# EAGLE board breakout (EAGLE 7.5.0)
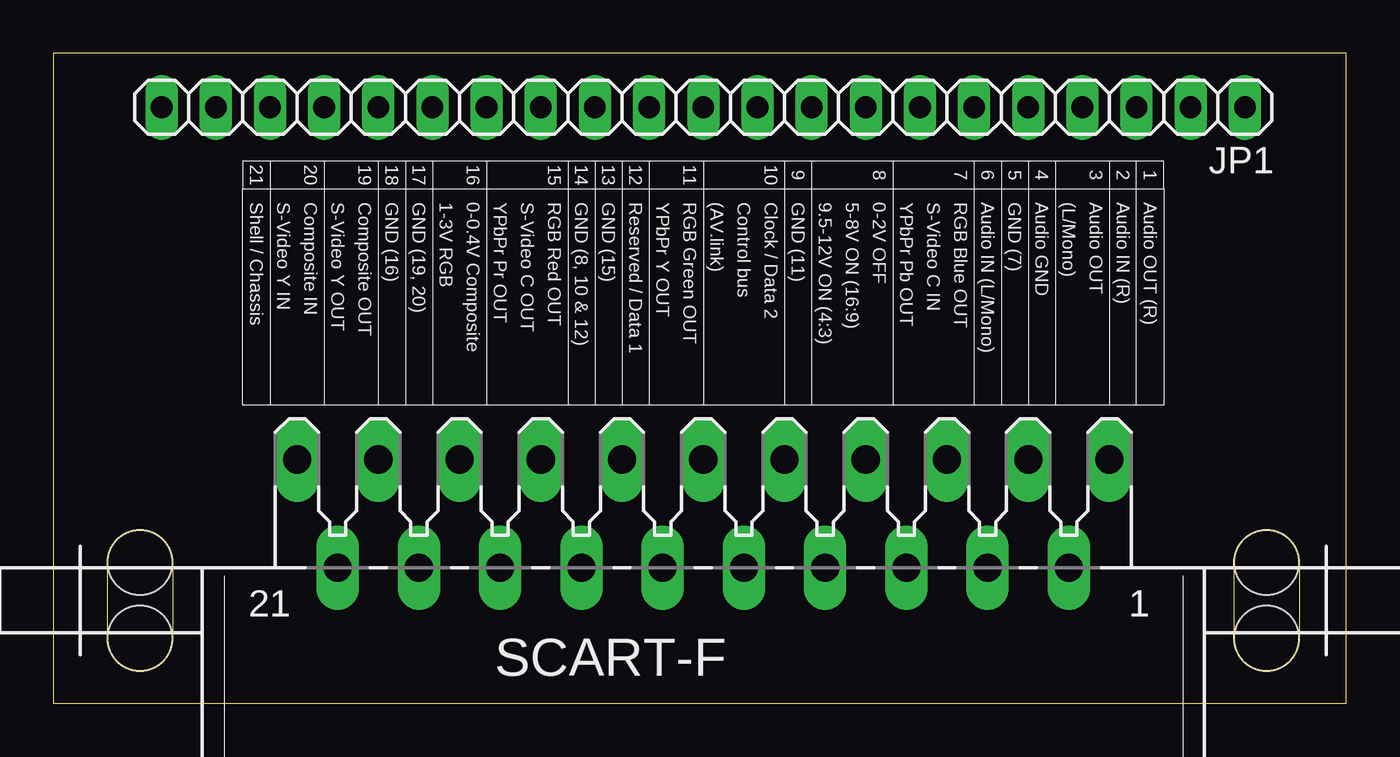
[diagram p0: board, top side]
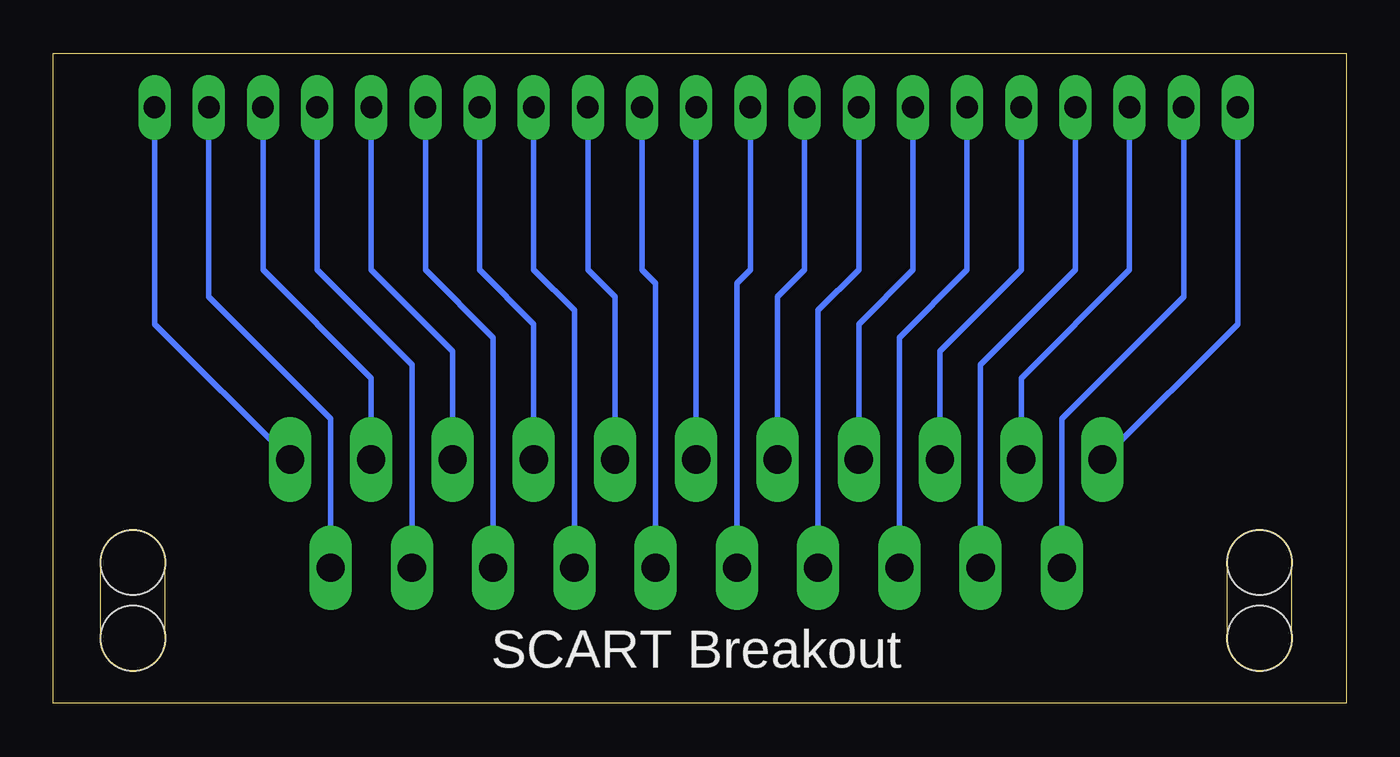
[diagram p1: board, bottom side, seen from below]

Size 60.63 x 30.47 mm. Coordinates in mm from the lower left corner, seen from the top.
Outline: 0,0 60.63,0 60.63,30.47 0,30.47 0,0
Copper layers (1*16): Top 0.035mm / dielectric 1.5mm / Bottom 0.035mm
Design rules "default": minimum track width 10mil, minimum drill 24mil, track to track 8mil, track to pad 8mil, pad to pad 8mil, via to via 8mil, smd to smd 8mil, copper to edge 40mil, drill to drill 8mil, minimum pad ring 10mil, minimum via ring 8mil, stop-mask expansion 4mil, vias tented up to drill 0mil, thermal gap 10mil

## Footprints (pad centres in the part's own frame; a part is rotated, then mirrored left to right if it is on the bottom)
1X21 = drill 1.016 long: 1 -25.4,0; 2 -22.86,0; 3 -20.32,0; 4 -17.78,0; 5 -15.24,0; 6 -12.7,0; 7 -10.16,0; 8 -7.62,0; 9 -5.08,0; 10 -2.54,0; 11 0,0; 12 2.54,0; 13 5.08,0; 14 7.62,0; 15 10.16,0; 16 12.7,0; 17 15.24,0; 18 17.78,0; 19 20.32,0; 20 22.86,0; 21 25.4,0
SCART-F = drill 1.321 long: 1 19.05,5.08; 2 17.145,0; 3 15.24,5.08; 4 13.335,0; 5 11.43,5.08; 6 9.525,0; 7 7.62,5.08; 8 5.715,0; 9 3.81,5.08; 10 1.905,0; 11 0,5.08; 12 -1.905,0; 13 -3.81,5.08; 14 -5.715,0; 15 -7.62,5.08; 16 -9.525,0; 17 -11.43,5.08; 18 -13.335,0; 19 -15.24,5.08; 20 -17.145,0; 21 -19.05,5.08 | hole 3.023: 26.416,0.254; 26.416,-3.302; -26.416,0.254; -26.416,-3.302

## Placement (x,y rotation side)
JP1  [1X21]  30.48,27.94 180 top
X1  SCART-F  [SCART-F]  30.48,6.35 0 top

## Library data of the parts
JP1 = pinhead
X1 = con-hirschmann; OC_FARNELL: unknown; OC_NEWARK: unknown

## Nets
N$1: JP1.10 X1.10
N$2: JP1.12 X1.12
N$3: JP1.8 X1.8
N$4: JP1.6 X1.6
N$5: JP1.4 X1.4
N$6: JP1.2 X1.2
N$7: JP1.14 X1.14
N$8: JP1.16 X1.16
N$9: JP1.18 X1.18
N$10: JP1.20 X1.20
N$11: JP1.21 X1.21
N$12: JP1.19 X1.19
N$13: JP1.17 X1.17
N$14: JP1.15 X1.15
N$15: JP1.13 X1.13
N$16: JP1.11 X1.11
N$17: JP1.9 X1.9
N$18: JP1.7 X1.7
N$19: JP1.5 X1.5
N$20: JP1.3 X1.3
N$21: JP1.1 X1.1

## Tracks (layer width: path | path; a pad name or v marks a point on that pad's centre or on a via)
N$1
  Bottom 0.254: X1.10 32.38,19.68 33.02,20.32 JP1.10
N$2
  Bottom 0.254: X1.12 28.57,19.68 27.94,20.32 JP1.12
N$3
  Bottom 0.254: X1.8 36.2,18.41 38.1,20.32 JP1.8
N$4
  Bottom 0.254: X1.6 40.01,17.14 43.18,20.32 JP1.6
N$5
  Bottom 0.254: X1.4 43.81,15.88 48.26,20.32 JP1.4
N$6
  Bottom 0.254: X1.2 47.62,13.34 53.34,19.05 JP1.2
N$7
  Bottom 0.254: X1.14 24.77,18.41 22.86,20.32 JP1.14
N$8
  Bottom 0.254: X1.16 20.95,17.14 17.78,20.32 JP1.16
N$9
  Bottom 0.254: X1.18 17.14,15.88 12.7,20.32 JP1.18
N$10
  Bottom 0.254: X1.20 13.34,13.34 7.62,19.05 JP1.20
N$11
  Bottom 0.254: X1.21 5.08,17.78 JP1.21
N$12
  Bottom 0.254: X1.19 15.24,15.24 10.16,20.32 JP1.19
N$13
  Bottom 0.254: X1.17 19.05,16.51 15.24,20.32 JP1.17
N$14
  Bottom 0.254: X1.15 22.86,17.78 20.32,20.32 JP1.15
N$15
  Bottom 0.254: X1.13 26.67,19.05 25.4,20.32 JP1.13
N$16
  Bottom 0.254: JP1.11 X1.11
N$17
  Bottom 0.254: X1.9 34.29,19.05 35.56,20.32 JP1.9
N$18
  Bottom 0.254: X1.7 38.1,17.78 40.64,20.32 JP1.7
N$19
  Bottom 0.254: X1.5 41.91,16.51 45.72,20.32 JP1.5
N$20
  Bottom 0.254: X1.3 45.72,15.24 50.8,20.32 JP1.3
N$21
  Bottom 0.254: X1.1 55.88,17.78 JP1.1

## Text on the board
bPlace: SCART Breakout
tNames: 21 | 20 | 19 | 18 | 17 | 16 | 15 | 14 | 13 | 12 | 11 | 10 | 9 | 8 | 7 | 6 | 5 | 4 | 3 | 2 | 1 | Shell / Chassis | S-Video Y IN | Composite IN | S-Video Y OUT | Composite OUT | GND (16) | GND (19, 20) | 1-3V RGB | 0-0.4V Composite | YPbPr Pr OUT | S-Video C OUT | RGB Red OUT | GND (8, 10 & 12) | GND (15) | Reserved / Data 1 | YPbPr Y OUT | RGB Green OUT | (AV.link) | Control bus | Clock / Data 2 | GND (11) | 9.5-12V ON (4:3) | 5-8V ON (16:9) | 0-2V OFF | YPbPr Pb OUT | S-Video C IN | RGB Blue OUT | Audio IN (L/Mono) | GND (7) | Audio GND | (L/Mono) | Audio OUT | Audio IN (R) | Audio OUT (R)